# Altium PCB PCB1.PcbDoc
Units mil, origin at the board's own origin, x right, y up, seen from the top; angles counter-clockwise.
Board outline 1770 x 1615 mil, 2 copper layers (Top Layer, Bottom Layer); 40 components, 31 nets, 201 pads, 25 vias.
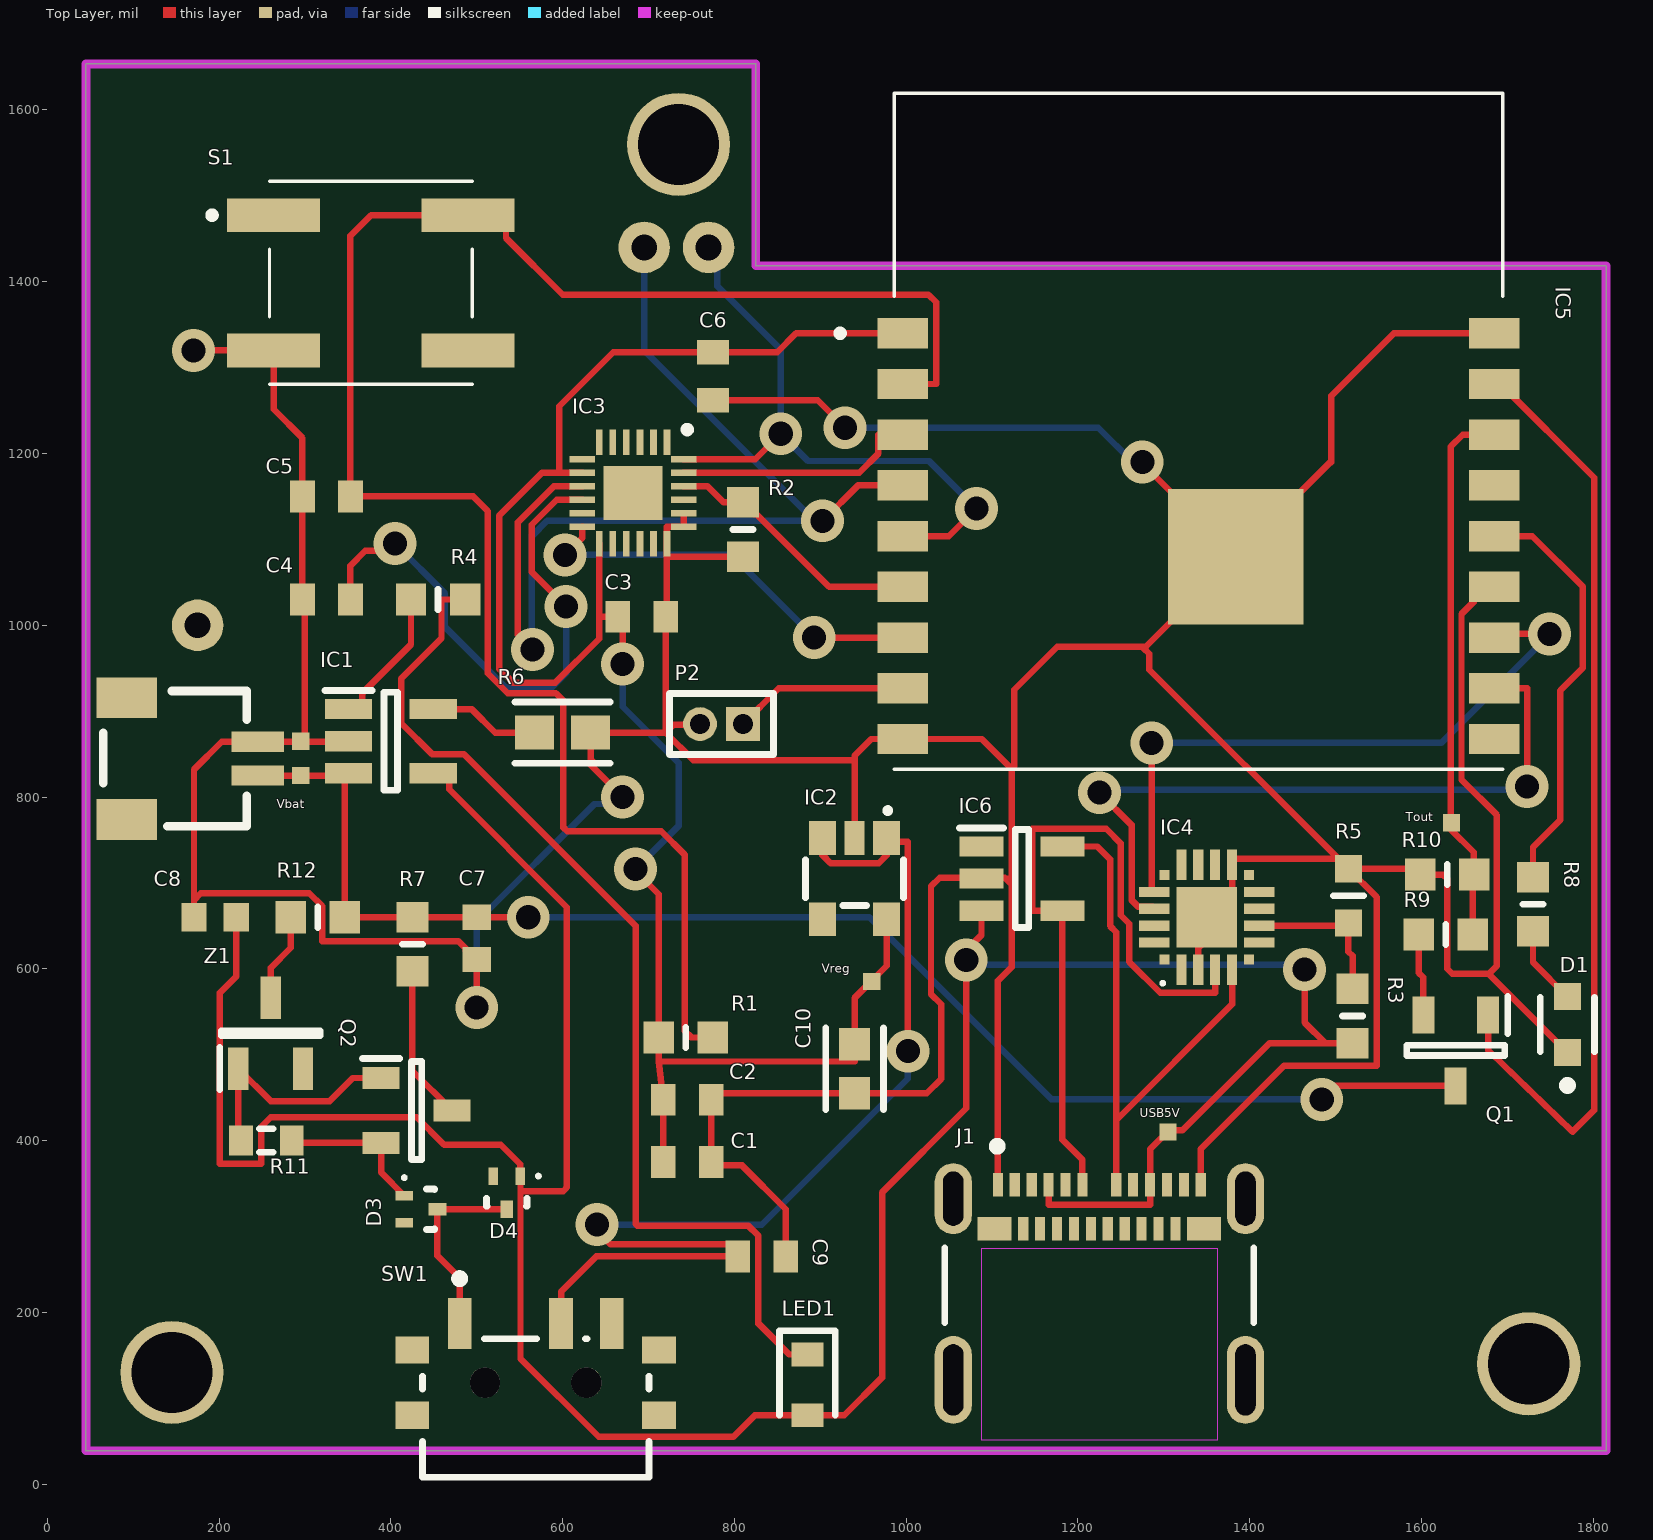
[diagram p0: Top Layer view]
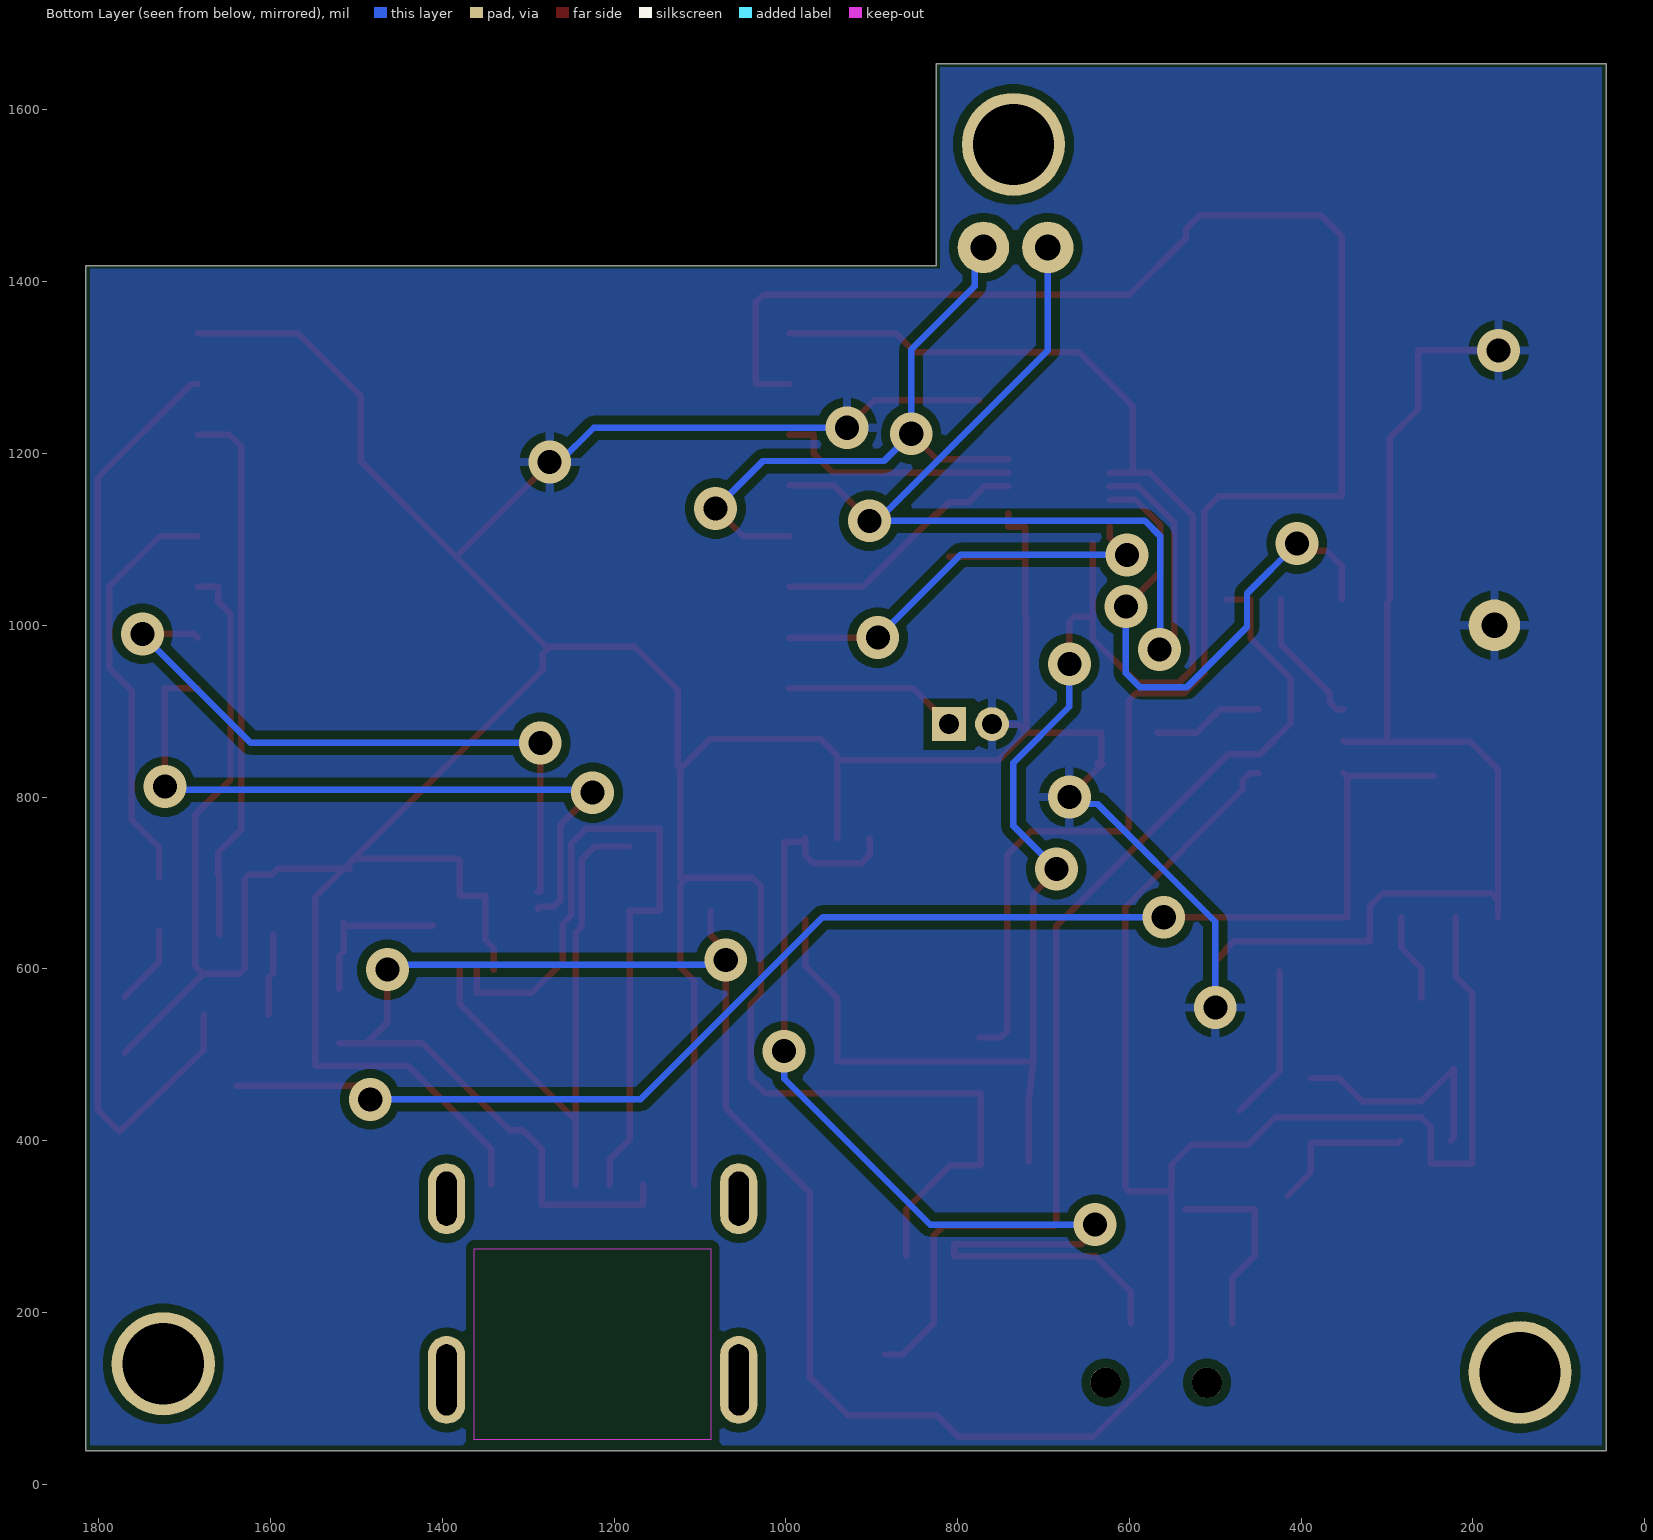
[diagram p1: Bottom Layer view, seen from below]
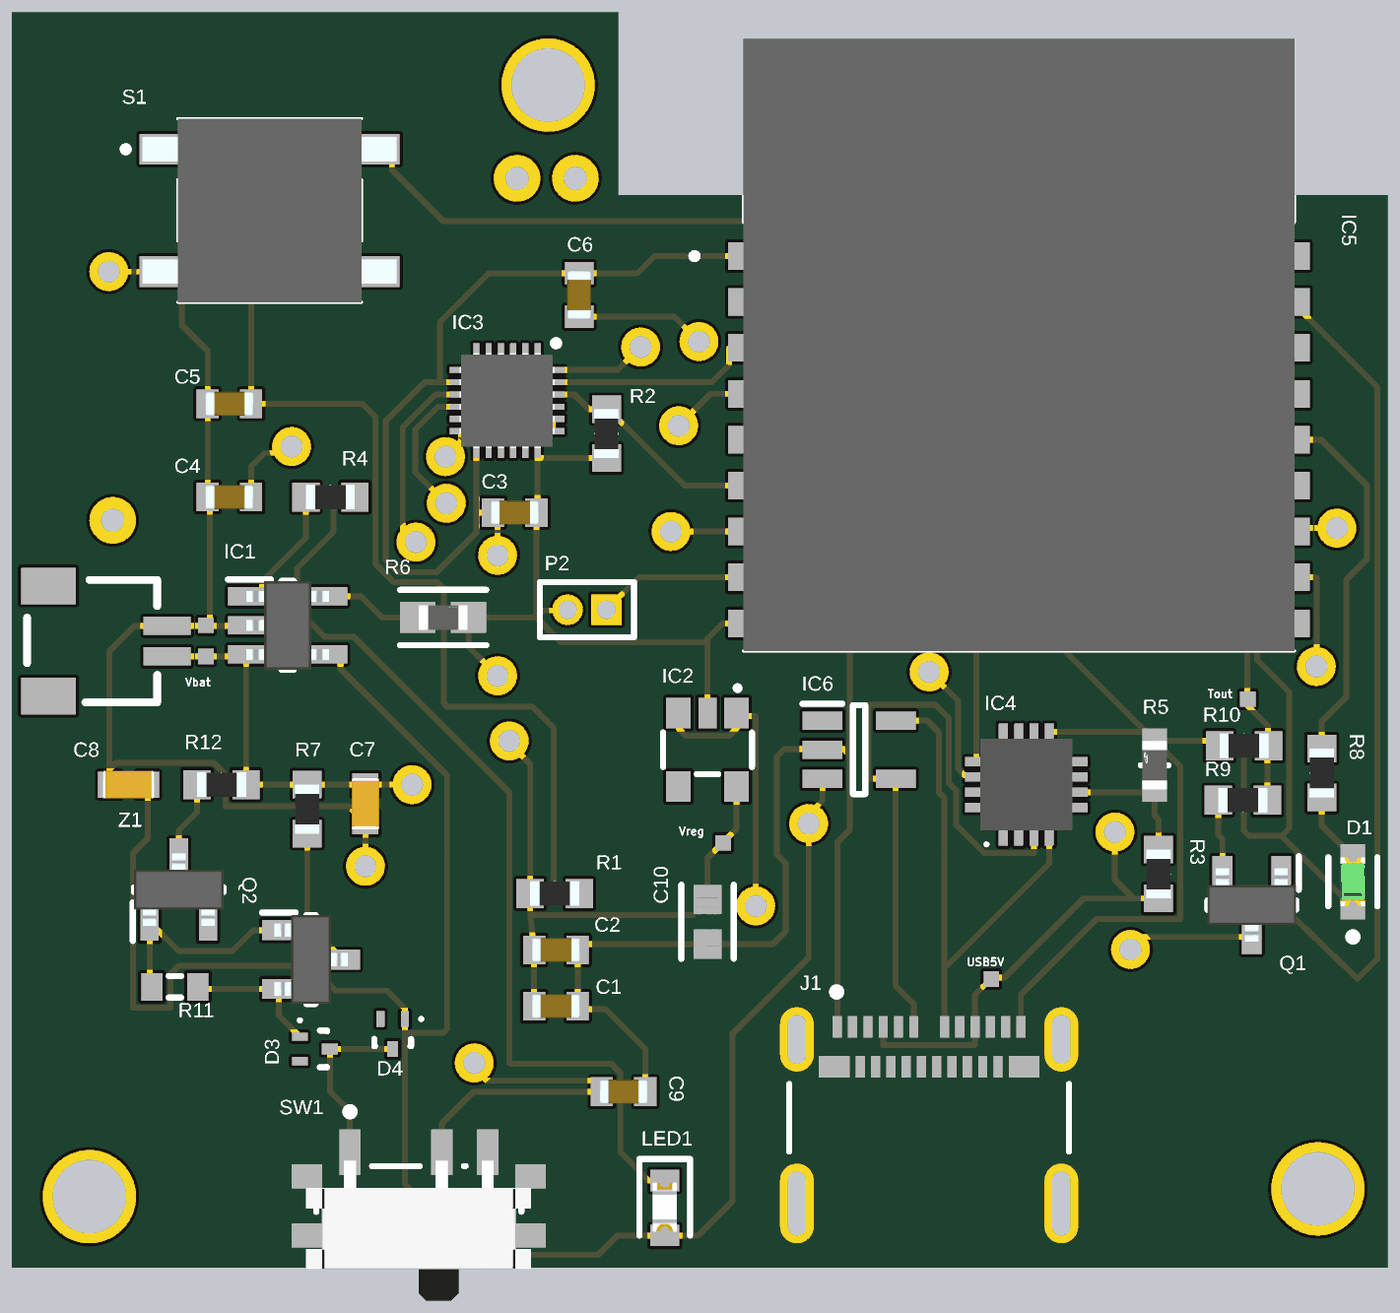
[diagram p2: 3D render of the assembled board from above, using the file's embedded part models]

## Layer stack, top to bottom
Top Solder: solder mask 0.4, Solder Resist, Dk 3.5
Top Layer: signal copper 1.4
Dielectric 1: dielectric 12.6, FR-4, Dk 4.8
Bottom Layer: signal copper 1.4
Bottom Solder: solder mask 0.4, Solder Resist, Dk 3.5

## Board outline
45,38.58 45,1653.58 825,1653.58 825,1418.58 1815,1418.58 1815,38.58

## Design rules (kind name [scope] priority, off if disabled: settings)
Clearance [All] p1: gap=10 ignorepadtopadclearanceinfootprint=FALSE except(0: Arc-Hole Track-Hole SMDPad-Hole THPad-Hole Via-Hole Fill-Hole Poly-Hole Region-Hole Text-Hole; 5: Arc-Arc Arc-Track Arc-SMDPad Track-Track Track-SMDPad SMDPad-SMDPad)
PolygonConnect [All] p1: connectstyle=Relief reliefconductorwidth=10 reliefentries=4 polygonreliefangle="90 Angle" airgapwidth=10
RoutingVias [All] p1: holewidth=28 width=50 viastyle="Through Hole" minholewidth=28 minwidth=50 maxholewidth=28 maxwidth=50
SolderMaskExpansion [All] p1: expansion=4 istentingtop=FALSE
Width [All] p1: maxlimit=10 minlimit=5 preferedwidth=7.5 minimp=50.000000 maximp=50.000000 favimp=50.000000 checkconnectedcopper=TRUE
30 further rules are at their usual default settings.

## Components (designator, comment, footprint, x,y, rotation, side; value= is the part's Value field where it differs from the comment)
C1 "CL10B103KB8NNNC" CAPC1608X90N 745,375 r0 top
C2 "CL10B103KB8NNNC" CAPC1608X90N 745,447.4 r0 top
C3 "CL10B104KB8NNWC" CAPC1608X90N 692.05,1010 r0 top
C4 "CL10B104KB8NNWC" CAPC1608X90N 325,1030 r180 top
C5 "CL10B104KB8NNWC" CAPC1608X90N 325,1150 r180 top
C6 "CL10B104KB8NNWC" CAPC1608X90N 775,1290 r270 top
C7 "CL10A475KQ8NNNC" CAPC1608X90X30LL10T20 500,635.39 r270 top
C8 "CL10A475KQ8NNNC" CAPC1608X90X30LL10T20 195.39,660 r0 top
C9 "CL10B104KB8NNWC" CAPC1608X90N 832.05,265 r0 top
C10 "CL10B105KP8NFNC" FP-CL10-IPC_B 940,483.62 r270 top
D1 "SML-E12P8WT86" FP-SML-E12-MFG 1770,535 r90 top
D3 "MMBD301M3T5G" ONSC-SOT-723-3-631AA-01_V 435,320 r0 top
D4 "MMBD301M3T5G" ONSC-SOT-723-3-631AA-01_V 535,339.29 r270 top
IC1 "MCP73831T-2ATI_OT" SOT95P270X145-5N 400,865 r0 top
IC2 "TCR2EF33,LM_CT" SOT-25 940,705 r180 top
IC3 "MPU-6881" QFN40P300X300X95-25N-D 682.13,1154.06 r270 top
IC4 "CP2102N-A02-GQFN20" CP2102NA02GQFN20 1350,660 r90 top
IC5 "ESP-WROOM-02D_M1102H3200PH3Q0_" ESPWROOM02DM1102H3200PH3Q0 1340.51,1225.83 r0 top
IC6 "SP0504BAHTG" SOT95P280X145-5N 1135,705 r0 top
J1 "1054500101" FP-1054500101-MFG 1225,200 r0 top
J2 "SM02B-SRSS-TB__LF__SN_" SM02B-SRSS-TB 64.88,923.42 r270 top
LED1 "SML-D12Y1WT86" LEDC1608X55N 885,115.43 r270 top
P2 "MHDR1X2" MHDR1X2 810,885 r180 top
Q1 "SSM3J356R,LF" SOT96P240X110-3N 1640,505 r270 top
Q2 "SSM3J356R,LF" SOT96P240X110-3N 430,435 r0 top
R1 "CR0603-FX-1002ELF" RESC1608X55N 743.5,520 r180 top
R2 "CR0603-FX-1002ELF" RESC1608X55N 810,1111.5 r270 top
R3 "CR0603-FX-2212ELF" RESC1608X55N 1520,545 r90 top
R4 "CR0603-FX-1001ELF" RESC1608X55N 455,1030 r180 top
R5 "RC1608F4752CS" FP-RC1608-MFG 1515,685 r90 top
R6 "CR0603-FX-2001ELF" FP-CR0603-IPC_A 600,875 r0 top
R7 "CR0603-FX-1001ELF" RESC1608X55N 425,628.5 r270 top
R8 "CR0603-FX-1001ELF" RESC1608X55N 1730,675 r270 top
R9 "CR0603-FX-1001ELF" RESC1608X55N 1628.5,640 r0 top
R10 "CR0603-FX-1001ELF" RESC1608X55N 1630,710 r180 top
R11 "Res3" J1-0603 255,400 r0 top value=0
R12 "CR0603-FX-1002ELF" RESC1608X55N 315,660 r0 top
S1 "EVP-BFAC1A000" EVPBFAC1A000 376.81,1398.74 r180 top
SW1 "PCM12SMTR" FP-PCM12SMTR-MFG 568.7,88.58 r0 top
Z1 "MMBZ5225BLT1G" SOT96P237X111-3N 260,525 r90 top

## Footprints (in the part's own frame and the unit in brackets; to place one, negate y for a bottom-side part, rotate by r counter-clockwise, add the part's x,y. Pads: shape width x height; smd on the part's side, far side on the other; paste and mask are expansions set on the pad)
CAPC1608X90N [mm]
  rect 0.73x0.94 smd: 1(-0.71,0) 2(0.71,0)
  body extent -0.8,-0.4 0.8,0.4, height 0.9
CAPC1608X90X30LL10T20 [mm] "Chip Capacitor, 2-Leads, Body 1.70x0.90mm, IPC High Density"
  rect 0.75x0.85 smd: 1(-0.625,0) 2(0.625,0)
  body extent -0.85,-0.45 0.85,0.45, height 0.9
CP2102NA02GQFN20 [mm]
  rect 0.3x0.3 smd: 1(-1.25,1.25) 6(-1.25,-1.25) 11(1.25,-1.25) 16(1.25,1.25)
  rect 0.9x0.3 smd: 2(-1.55,0.75) 3(-1.55,0.25) 4(-1.55,-0.25) 5(-1.55,-0.75) 12(1.55,-0.75) 13(1.55,-0.25) 14(1.55,0.25) 15(1.55,0.75)
  rect 0.3x0.9 smd: 7(-0.75,-1.55) 8(-0.25,-1.55) 9(0.25,-1.55) 10(0.75,-1.55) 17(0.75,1.55) 18(0.25,1.55) 19(-0.25,1.55) 20(-0.75,1.55)
  rect 1.8x1.8 smd: 21(0,0)
  silkscreen extent -2,1.25 -1.9,1.35, body extent -1.5,-1.5 1.5,1.5, height 0.75
ESPWROOM02DM1102H3200PH3Q0 [mm]
  rect 1.5x0.9 smd: 1(-8.75,2.9) 2(-8.75,1.4) 3(-8.75,-0.1) 4(-8.75,-1.6) 5(-8.75,-3.1) 6(-8.75,-4.6) 7(-8.75,-6.1) 8(-8.75,-7.6) 9(-8.75,-9.1) 10(8.75,-9.1) 11(8.75,-7.6) 12(8.75,-6.1) 13(8.75,-4.6) 14(8.75,-3.1) 15(8.75,-1.6) 16(8.75,-0.1) 17(8.75,1.4) 18(8.75,2.9)
  rect 4x4 smd: 19(1.1,-3.71)
  silkscreen extent -10.7,-10 9,10, body extent -9,-10 9,10, height 3.4
EVPBFAC1A000 [mm]
  rect 2.75x1 smd: A1(2.875,-2) A2(-2.875,-2) B1(2.875,2) B2(-2.875,2)
  silkscreen extent -3,-3 4.8,3, body extent -4.15,-3 4.15,3, height 3.8
FP-1054500101-MFG [mm]
  rrect100% 1.1x2.1 hole 1.6 slot 0.6 at 0 deg paste-1000 mask+0: 1(-4.32,3.36) 2(4.32,3.36)
  rrect100% 1.1x2.6 hole 2.1 slot 0.6 at 0 deg paste-1000 mask+0: 3(-4.32,-2) 4(4.32,-2)
  rect 0.3x0.7 smd paste+0 mask+0: A1(-3,3.77) A2(-2.5,3.77) A3(-2,3.77) A4(-1.5,3.77) A5(-1,3.77) A6(-0.5,3.77) A7(0.5,3.77) A8(1,3.77) A9(1.5,3.77) A10(2,3.77) A11(2.5,3.77) A12(3,3.77) B2(2.25,2.47) B3(1.75,2.47) B4(1.25,2.47) B5(0.75,2.47) B6(0.25,2.47) B7(-0.25,2.47) B8(-0.75,2.47) B9(-1.25,2.47) B10(-1.75,2.47) B11(-2.25,2.47)
  rect 1x0.7 smd paste+0 mask+0: B1(3.1,2.47) B12(-3.1,2.47)
  Keep-Out Layer region: -3.5,-3.77 3.5,-3.77 3.5,1.88 -3.5,1.88
  silkscreen extent -4.57,-0.3 4.57,5.03
FP-CL10-IPC_B [mil]
  rect 37.72x35.91 smd paste+0 mask+0: 1(-28.62,0) 2(28.62,0)
  silkscreen extent -47,-34 47,34, body extent -57,-28 57,28, height 10
FP-CR0603-IPC_A [mil]
  rect 45.6x39.85 smd paste+0 mask+0: 1(-32.56,0) 2(32.56,0)
  silkscreen extent -55,-36 55,36, body extent -75,-40 75,40, height 10
FP-PCM12SMTR-MFG [mm]
  rect 0.7x1.5 smd paste+0 mask+0: 1(-2.25,2.5) 2(0.75,2.5) 3(2.25,2.5)
  rect 1x0.8 smd paste+0 mask+0: 4(-3.65,1.715) 5(3.65,1.715) 6(-3.65,-0.215) 7(3.65,-0.215)
  round 0.9 hole 0.9 unplated paste-1000 mask+0: ""(-1.5,0.75) ""(1.5,0.75)
  silkscreen extent -3.35,-2.05 3.35,3.95, body extent -4.25,-2.15 4.25,3.35, height 0.25
FP-RC1608-MFG [mm]
  rect 0.8x0.8 smd paste+0 mask+0: 1(-0.8,0) 2(0.8,0)
  silkscreen extent 0,-0.45 0,0.45, body extent -1.3,-0.55 1.3,0.55, height 0.25
FP-SML-E12-MFG [mm]
  rect 0.8x0.8 smd paste+0 mask+0: 1(-0.825,0) 2(0.825,0)
  silkscreen extent -1.92,-0.8 0.8,0.8, body extent -1.33,-0.55 1.33,0.55, height 0.25
J1-0603 [mm] "Chip Resistor, Body 1.6x0.8mm, IPC High Density"
  rect 0.7x0.9 smd: 1(-0.75,0) 2(0.75,0)
  silkscreen extent -0.2,-0.35 0.2,0.35, body extent -0.85,-0.48 0.85,0.48, height 0.9
LEDC1608X55N [mm]
  rect 0.7x0.95 smd: 1(-0.9,0) 2(0.9,0)
  silkscreen extent -1.6,-0.82 0.9,0.82, body extent -0.83,-0.4 0.77,0.4, height 0.55
MHDR1X2 [mm] "Connector; Header; 2 Position"
  rect 1x1 hole 0.6: 1(0,0)
  round 1 hole 0.6: 2(1.27,0)
  silkscreen extent -0.9,-0.9 2.17,0.9
ONSC-SOT-723-3-631AA-01_V [mm] "SOT223, 3-Leads, Body 1.2x0.8mm, Pitch 0.4mm"
  rect 0.52x0.27 smd: 1(-0.49,0.4) 2(-0.49,-0.4)
  rect 0.52x0.36 smd: 3(0.49,0)
  silkscreen extent -0.54,-0.6 0.4,0.98, body extent -0.4,-0.6 0.4,0.6, height 0.55
QFN40P300X300X95-25N-D [mm]
  rect 0.75x0.2 smd: 1(-1.5,1) 2(-1.5,0.6) 3(-1.5,0.2) 4(-1.5,-0.2) 5(-1.5,-0.6) 6(-1.5,-1) 13(1.5,-1) 14(1.5,-0.6) 15(1.5,-0.2) 16(1.5,0.2) 17(1.5,0.6) 18(1.5,1)
  rect 0.2x0.75 smd: 7(-1,-1.5) 8(-0.6,-1.5) 9(-0.2,-1.5) 10(0.2,-1.5) 11(0.6,-1.5) 12(1,-1.5) 19(1,1.5) 20(0.6,1.5) 21(0.2,1.5) 22(-0.2,1.5) 23(-0.6,1.5) 24(-1,1.5)
  rect 1.59x1.75 smd: 25(0,0)
  silkscreen extent -1.97,1.5 -1.78,1.7, body extent -1.55,-1.55 1.55,1.55, height 0.95
RESC1608X55N [mm]
  rect 0.9x0.95 smd: 1(-0.8,0) 2(0.8,0)
  silkscreen extent 0,-0.3 0,0.3, body extent -0.8,-0.4 0.8,0.4, height 0.55
SM02B-SRSS-TB [mm]
  rect 0.6x1.55 smd: 1(1.5,4.575) 2(2.5,4.575)
  rect 1.2x1.8 smd: 3(0.2,0.7) 4(3.8,0.7)
  silkscreen extent 0,0 4,4.25
SOT95P270X145-5N [mm]
  rect 1.4x0.6 smd: 1(-1.25,0.95) 2(-1.25,0) 3(-1.25,-0.95) 4(1.25,-0.95) 5(1.25,0.95)
  silkscreen extent -1.95,-1.45 0.2,1.5, body extent -1.35,-1.45 1.35,1.45, height 1.45
SOT95P280X145-5N [mm]
  rect 1.3x0.6 smd: 1(-1.2,0.95) 2(-1.2,0) 3(-1.2,-0.95) 4(1.2,-0.95) 5(1.2,0.95)
  silkscreen extent -1.85,-1.45 0.2,1.5
SOT96P237X111-3N [mm]
  rect 1.25x0.6 smd: 1(-1.05,0.955) 2(-1.05,-0.955) 3(1.05,0)
  silkscreen extent -1.68,-1.46 0.07,1.51, body extent -1.18,-1.46 1.18,1.46, height 1.11
SOT96P240X110-3N [mm]
  rect 1.1x0.65 smd: 1(-1.05,0.96) 2(-1.05,-0.96) 3(1.05,0)
  silkscreen extent -1.6,-1.45 0.15,1.54, body extent -1.2,-1.45 1.2,1.45, height 1.1
SOT-25 [mm]
  rect 0.8x1 smd: 1(-0.95,-1.2) 3(0.95,-1.2) 4(0.95,1.2) 5(-0.95,1.2)
  rect 0.6x1 smd: 2(0,-1.2)
  silkscreen extent -1.45,-2.07 1.45,0.8

## Part data
C1 C2: "Capacitor", Manufacturer_Name="Samsung Electro-Mechanics", Mouser Part Number=187-CL10B103KB8NNNC, Arrow Part Number=CL10B103KB8NNNC, Arrow Price/Stock=https://www.arrow.com/en/products/cl10b103kb8nnnc/samsung-electro-mechanics?region=nac, Datasheet Link=https://datasheet.datasheetarchive.com/originals/distributors/Datasheets_SAMA/f3f01ceab90a863c6d6e9eba92d45bd3.pdf, Height=0.9mm, Manufacturer_Part_Number=CL10B103KB8NNNC, Mouser Price/Stock=https://www.mouser.co.uk/ProductDetail/Samsung-Electro-Mechanics/CL10B103KB8NNNC?qs=349EhDEZ59pAsZxZjVI0UQ%3D%3D
C3 C4 C5 C6 C9: "Capacitor", Manufacturer_Name="Samsung Electro-Mechanics", Datasheet Link=http://www.samsungsem.com/kr/support/product-search/mlcc/CL10B104KB8NNWC.jsp, Height=0.9mm, Manufacturer_Part_Number=CL10B104KB8NNWC
C7 C8: library part CMP-2000-06090-1, "Chip Capacitor, 4.7 uF, +/- 10%, 6.3 V, -55 to 85 degC, 0603 (1608 Metric), RoHS, Tape and Reel", Capacitance=4700000pF, Case Size/Dimension=0603, Dielectric=X5R, Manufacturer="Samsung Electro-Mechanics", Package Description="2-Pin Surface Mount Device, Body 1.60 x 0.80 mm", Rated Voltage=6.3V, Tolerance (%)=±10%, Datasheet URL=http://www.samsungsem.com/kr/support/product-search/mlcc/__icsFiles/afieldfile/2016/08/18/S_CL10A475KQ8NNNC.pdf, Datasheet Version=07/2016, Manufacturer URL=http://www.samsungsem.com/global/index.jsp, Mounting Technology=SurfaceMount, Package Reference=0603
C10: library part CMP-13271-002470-1, "Cap Ceramic 1uF 10V X7R ±10% Pad SMD 0603 +125°C T/R", Capacitance=1uF, Case Code (Imperial)=0603, Case Code (Metric)=1608, Dielectric=X7R, Max Operating Temperature=125°C, Min Operating Temperature=-55°C, Package Quantity=1, Tolerance=10%, Voltage Rating=10V, Case/Package=0603, Depth=0.8mm, Height=0.8mm, Length=0.063inch, Mount="Surface Mount", Packaging="Tape and Reel", Radiation Hardening=No, Thickness=0.035inch, Width=0.031inch
D1: library part CMP-08952-000024-1, "LED GREEN DIFFUSED 0603 SMD", Colour=Green, Forward Current=20mA, Forward Voltage=2.2V, Manufacturer=Rohm, Package=SML-E12, Power Dissipation=54mW, Reverse Voltage=5V, Temperature="-40°C to +85°C", Temperature Range High=+85°C, Temperature Range Low=-40°C, Automotive=No, Category=Diode, ComponentLink2Description=Datasheet, ComponentLink2URL=https://fscdn.rohm.com/en/products/databook/datasheet/opto/led/chip_mono/sml-e1-e.pdf, Device Class L1=Optoelectronics, Device Class L2=LEDs, Device Class L3=unset, Digikey Description="LED GREEN DIFFUSED 0603 SMD", Height=0.4mm, Lead Free=Yes, Led Orientation="Top View", Luminous Intensity=6.3mcd, Manufacturer Part Number=SML-E12P8WT86, Mouser Description="LED Uni-Color Green 2-Pin Chip 0603(1608Metric) T/R", Octopart=https://octopart.com/sml-e12p8wt86-rohm-9290854, RoHS=TRUE, Wavelength=560nm
D3 D4: library part CMP-1055-00589-1, "Silicon Hot-Carrier Diode, Schottky Barrier Diode, 3-Pin SOT-723, Pb-Free, Tape and Reel", Manufacturer="On Semiconductor", ComponentLink1Description="Manufacturer URL", ComponentLink1URL=http://www.onsemi.com/, ComponentLink2Description=Datasheet, ComponentLink2URL=http://www.onsemi.cn/pub_link/Collateral/MMBD301M3-D.PDF, ComponentLink3Description="Package Specification", ComponentLink3URL=http://www.onsemi.com/pub_link/Collateral/631AA.PDF, Configuration=Single, DatasheetVersion="Rev. 1", Mounting Technology="Surface Mount", PackageDescription="3-Pin Small Outline Transistor, Body 1.2 x 0.8 mm, Pitch 0.4 mm", PackageReference=SOT-723-3-631AA-01, PackageVersion="Rev. D, 08/2009", Packing="Tape and Reel", PartNumber=MMBD301M3T5G, RoHS=TRUE
IC1: "Integrated Circuit", Arrow Part Number=MCP73831T-2ATI/OT, Manufacturer_Name=Microchip, Mouser Part Number=579-MCP73831T-2ATIOT, Arrow Price/Stock=https://www.arrow.com/en/products/mcp73831t-2atiot/microchip-technology?region=nac, Datasheet Link=https://datasheet.datasheetarchive.com/originals/distributors/Datasheets-DGA15/727147.pdf, Height=1.45mm, Manufacturer_Part_Number=MCP73831T-2ATI/OT, Mouser Price/Stock=https://www.mouser.co.uk/ProductDetail/Microchip-Technology/MCP73831T-2ATI-OT?qs=yUQqVecv4qsZbioEUu%252B83g%3D%3D
IC2: "Integrated Circuit", Arrow Part Number=TCR2EF33,LM(CT, Manufacturer_Name=Toshiba, Mouser Part Number=757-TCR2EF33LMCT, Arrow Price/Stock=https://www.arrow.com/en/products/tcr2ef33lm-ct/toshiba, Datasheet Link=https://toshiba.semicon-storage.com/eu/product/linear/power-supply/detail.TCR2EF33.html, Manufacturer_Part_Number=TCR2EF33,LM(CT, Mouser Price/Stock=https://www.mouser.co.uk/ProductDetail/Toshiba/TCR2EF33LMCT?qs=EPmvyOv1YlPmhsvS3PaWfg%3D%3D
IC3: "Integrated Circuit", Manufacturer_Name=TDK, Mouser Part Number=410-MPU-6881, Arrow Part Number=MPU-6881, Arrow Price/Stock=https://www.arrow.com/en/products/mpu-6881/invensense?region=nac, Datasheet Link=https://www.semiconductorstore.com/Images/Items/Uploaded/0236/mpu-6881-a7be4.pdf, Height=0.95mm, Manufacturer_Part_Number=MPU-6881, Mouser Price/Stock=https://www.mouser.co.uk/ProductDetail/TDK-InvenSense/MPU-6881?qs=u4fy%2FsgLU9MthFpyRcZ0%252Bg%3D%3D
IC4: "Integrated Circuit", Manufacturer_Name="Silicon Labs", Mouser Part Number=634-CP2102NA02GQFN20, Arrow Part Number=CP2102N-A02-GQFN20, Arrow Price/Stock=https://www.arrow.com/en/products/cp2102n-a02-gqfn20/silicon-labs?region=nac, Datasheet Link=https://www.silabs.com/documents/public/data-sheets/cp2102n-datasheet.pdf, Height=0.8mm, Manufacturer_Part_Number=CP2102N-A02-GQFN20, Mouser Price/Stock=https://www.mouser.co.uk/ProductDetail/Silicon-Labs/CP2102N-A02-GQFN20?qs=u16ybLDytRaG8WdlP0fT2g%3D%3D
IC5: "Integrated Circuit", Manufacturer_Name="Espressif Systems", Manufacturer_Part_Number=ESP-WROOM-02D(M1102H3200PH3Q0), Mouser Part Number=356-ESPWROOM02D(4MB), Datasheet Link=https://www.mouser.com.tr/datasheet/2/891/esp-wroom-02d_esp-wroom-02u_datasheet_en-1365835.pdf, Height=3.3mm, Mouser Price/Stock=https://www.mouser.co.uk/ProductDetail/Espressif-Systems/ESP-WROOM-02DM1102H3200PH3Q0?qs=W%2FMpXkg%252BdQ6VfEEQ948I3Q%3D%3D
IC6: "Integrated Circuit", Manufacturer_Name=LITTELFUSE, Mouser Part Number=576-SP0504BAHTG, Arrow Part Number=SP0504BAHTG, Arrow Price/Stock=https://www.arrow.com/en/products/sp0504bahtg/littelfuse, Datasheet Link=http://componentsearchengine.com/Datasheets/1/SP0504BAHTG.pdf, Height=1.45mm, Manufacturer_Part_Number=SP0504BAHTG, Mouser Price/Stock=https://www.mouser.co.uk/ProductDetail/Littelfuse/SP0504BAHTG?qs=zR8PVLWe1trv9sWzoBaD%252Bg%3D%3D
J1: library part CMP-04767-000004-1, "CONN RCP USB3.1 TYPEC 24P SMD RA", Current Rating=0.25/1.25/5A, Manufacturer=Molex, Package=0, Temperature="-30°C to +85°C", Temperature Range High=+85°C, Temperature Range Low=-30°C, Voltage Rating=30V, Automotive=No, Category=Conn, ComponentLink2Description=Datasheet, ComponentLink2URL=https://www.molex.com/webdocs/datasheets/pdf/en-us/1054500101_IO_CONNECTORS.pdf, Conn Orientation="Right Angle", Contact Material=Gold,Nickel, Device Class L1=Connectors, Device Class L2="USB Connectors", Device Class L3=unset, Digikey Description="CONN RCP USB3.1 TYPEC 24P SMD RA", Footprint Url=https://www.molex.com/pdm_docs/sd/1054500101_sd.pdf, Height=3.44mm, Is Female=yes, Lead Free=Yes, Manufacturer Part Number=1054500101, Mouser Description="USB Shielded I/O Receptacle; Type C; Right Angle; Surface Mount; Gold over Nickel", Number Of Contacts=24, Octopart=https://octopart.com/105450-0101-molex-68082325, Pitch=0.5mm, RoHS=TRUE, Shielding=true, Usb Standard="USB 3.1"
J2: "Connector", Manufacturer_Name="JST (JAPAN SOLDERLESS TERMINALS)", Manufacturer_Part_Number="SM02B-SRSS-TB (LF)(SN)", Datasheet Link=http://www.jst-mfg.com/product/pdf/eng/eSH.pdf
LED1: "LED", Manufacturer_Name="ROHM Semiconductor", Mouser Part Number=755-SML-D12Y1WT86, Datasheet Link=https://componentsearchengine.com/Datasheets/1/SML-D12Y1WT86.pdf, Height=0.55mm, Manufacturer_Part_Number=SML-D12Y1WT86, Mouser Price/Stock=https://www.mouser.co.uk/ProductDetail/ROHM-Semiconductor/SML-D12Y1WT86?qs=M3jcYzEJUdG%2FAKvzZK%252Bz7w%3D%3D
P2: "Header, 2-Pin", LatestRevisionDate=17-Jul-2002, LatestRevisionNote="Re-released for DXP Platform.", Publisher="Altium Limited"
Q1 Q2: "MOSFET (P-Channel)", Manufacturer_Name=Toshiba, Mouser Part Number=757-SSM3J356RLF, Arrow Part Number=SSM3J356R,LF, Arrow Price/Stock=https://www.arrow.com/en/products/ssm3j356rlf/toshiba?region=nac, Datasheet Link=http://toshiba.semicon-storage.com/info/docget.jsp?did=30685&prodName=SSM3J356R, Height=0.88mm, Manufacturer_Part_Number=SSM3J356R,LF, Mouser Price/Stock=https://www.mouser.co.uk/ProductDetail/Toshiba/SSM3J356RLF?qs=lhkzy8lC%252BSsL%2F1yLGjMnQA%3D%3D
R1 R2 R12: "Resistor", Manufacturer_Name=Bourns, Mouser Part Number=652-CR0603FX-1002ELF, Arrow Part Number=CR0603-FX-1002ELF, Arrow Price/Stock=https://www.arrow.com/en/products/cr0603-fx-1002elf/bourns?region=nac, Datasheet Link=https://www.bourns.com/pdfs/chpreztr.pdf, Height=0.55mm, Manufacturer_Part_Number=CR0603-FX-1002ELF, Mouser Price/Stock=https://www.mouser.co.uk/ProductDetail/Bourns/CR0603-FX-1002ELF?qs=K5ddiUFZPT6XHG0dQH96QA%3D%3D
R3: "Resistor", Manufacturer_Name=Bourns, Mouser Part Number=652-CR0603FX-2212ELF, Arrow Part Number=CR0603-FX-2212ELF, Arrow Price/Stock=https://www.arrow.com/en/products/cr0603-fx-2212elf/bourns, Datasheet Link=https://www.bourns.com/pdfs/chpreztr.pdf, Height=0.55mm, Manufacturer_Part_Number=CR0603-FX-2212ELF, Mouser Price/Stock=https://www.mouser.co.uk/ProductDetail/Bourns/CR0603-FX-2212ELF?qs=zx2075yZkZJFzojWSdyX6Q%3D%3D
R4 R7 R8 R9 R10: "Resistor", Manufacturer_Name=Bourns, Mouser Part Number=652-CR0603FX-1001ELF, Arrow Part Number=CR0603-FX-1001ELF, Arrow Price/Stock=https://www.arrow.com/en/products/cr0603-fx-1001elf/bourns?region=nac, Datasheet Link=https://www.bourns.com/pdfs/chpreztr.pdf, Height=0.55mm, Manufacturer_Part_Number=CR0603-FX-1001ELF, Mouser Price/Stock=https://www.mouser.co.uk/ProductDetail/Bourns/CR0603-FX-1001ELF?qs=K5ddiUFZPT4YQXF75Ui8dQ%3D%3D
R5: library part CMP-13261-003173-1, "Res Thick Film 0603 47.5kΩ 1% 0.1W ±100ppm/°C Molded SMD T/R", Case Code (Imperial)=0603, Case Code (Metric)=1608, Max Operating Temperature=155°C, Max Power Dissipation=100mW, Min Operating Temperature=-55°C, Resistance=47.5kR, Temperature Coefficient=100ppm/°C, Tolerance=1%, Voltage Rating (DC)=50V, Case/Package=0603, Composition="Thick Film", Contact Plating=Tin, Depth=0.8mm, Features="Moisture Resistant", Height=0.022inch, Lead Free="Lead Free", Length=0.063inch, Military Standard=Not, Number of Terminations=2, Packaging="Tape and Reel", Power Rating=100mW, Radiation Hardening=No, Width=0.031inch
R6: library part CMP-07231-005707-1, "Thick Film Chip Resistors 0603 2kΩ 0.1W 1% 100ppm/°C", Case Code (Imperial)=0603, Case Code (Metric)=1608, Max Operating Temperature=155°C, Max Power Dissipation=100mW, Min Operating Temperature=-55°C, Package Quantity=1, Resistance=2kR, Temperature Coefficient=100ppm/°C, Tolerance=1%, Voltage Rating=50V, Case/Package=0603, Composition="Thick Film", Contact Plating=Tin, Depth=0.8mm, Features="Moisture Resistant", Height=0.45mm, Length=1.6mm, Military Standard=Not, Mount="Surface Mount", Number of Pins=2, Number of Terminations=2, Packaging="Tape and Reel", Power Rating=100mW, Radiation Hardening=No, REACH SVHC="No SVHC", Termination=SMD/SMT, Thickness=457um, Voltage Rating (DC)=50V, Width=0.8mm
R11: "Resistor", LatestRevisionDate=29-May-2009, LatestRevisionNote="IPC-7351 Footprint Added.", PackageDescription="Chip Resistor", PackageReference=J1-0603, Published=8-Jun-2000, Publisher="Altium Limited"
S1: "Switch", Manufacturer_Name=Panasonic, Mouser Part Number=667-EVP-BFAC1A000, Arrow Part Number=EVP-BFAC1A000, Arrow Price/Stock=https://www.arrow.com/en/products/evp-bfac1a000/panasonic, Datasheet Link=https://industrial.panasonic.com/cdbs/www-data/pdf/ATK0000/ATK0000C432.pdf, Height=3.7mm, Manufacturer_Part_Number=EVP-BFAC1A000, Mouser Price/Stock=https://www.mouser.co.uk/ProductDetail/Panasonic/EVP-BFAC1A000?qs=OiaALIbqWFSeImjptaxnOQ%3D%3D
SW1: library part CMP-2000-06884-2, "SWITCH SLIDE SPDT 300MA 6V", Contact Current Rating=300mA, Contact Resistance=70mR, Insulation Resistance=100mR, Max Operating Temperature=85°C, Max Voltage Rating (DC)=6V, Min Operating Temperature=-20°C, Package Quantity=1, Actuator Length=1.5mm, Actuator Material=Nylon, Actuator Type=Standard, Contact Material="Copper Alloy", Contact Plating=Silver, Current Rating=300mA, Depth=5mm, Lead Free="Lead Free", Length=7.7mm, Max Current Rating=300mA, Mechanical Life=10000Cycles, Mount="Surface Mount", Orientation="Right Angle", Packaging="Tape and Reel", REACH SVHC="No SVHC", Switch Function=On-On, Switch Travel=1.5mm, Termination="Gull Wing", Throw Configuration=SPDT, Voltage Rating (AC)=6V, Voltage Rating (DC)=6V, Width=6.7mm
Z1: "Zener Diode", Manufacturer_Name="ON Semiconductor", Mouser Part Number=863-MMBZ5225BLT1G, Datasheet Link=https://www.onsemi.com/pdf/datasheet/mmbz5221blt1-d.pdf, Height=1.11mm, Manufacturer_Part_Number=MMBZ5225BLT1G, Mouser Price/Stock=https://www.mouser.co.uk/ProductDetail/onsemi/MMBZ5225BLT1G?qs=P4IOph%252Bbot8UVWwuT5140A%3D%3D

## Free pads (board coordinates)
  round 120 hole 94.5: 2(145,130) 2(735,1560) 2(1725,140)
  round 60 hole 30: 6(770,1440) 7(695,1440) 10(175,1000)
  rect 20x20 smd: 9(295,825) 9(295,865) 9(1305,410) 11(960,585) 11(1635,770)

## Via types
v1: diameter 50, hole 28, Top Layer to Bottom Layer, 25 vias

## Nets (pads, with @x,y where several pads share a name; then routed paths per layer and width w, separated by ;. In a path a pad name is that pad's centre, name@x,y a point inside that pad or via, vN(x,y) a via of type N, cw(c..) or ccw(c..) an arc to the next point about the centre after c; other vN are vias at no path point)
/CS: IC3.22 IC5.6 R2.1 | length 303.4
  Top Layer w7.5: IC3.22 768.73,1161.93 787.67,1142.99 R2.1 823.97,1129.03 825.99,1129.03 910.29,1044.72 IC5.6
GND: C1.2 C2.2 C3.2 C4.2 C5.2 C6.2 C7.2 C8.1 C9.2 C10.2 D1.1 IC1.2 IC2.2 IC3.18 IC3.19 IC3.20 IC4.3 IC4.12 IC4.21 IC5.9 IC5.13 IC5.18 IC5.19 IC6.2 J1.A1 J1.A12 J2.1 P2.2 pad.9@295,865 pad.10 R2.2 R5.2 R6.2 R10.2 S1.B1 | length 7834.2
  Top Layer w7.5: v1(170,1320) S1.B1 263.62,1251.43 297.05,1218 C5.2 C4.2 300,1027.05 300,865 pad.9@299.37,864.37 ; C8.1 170.79,680 ; IC1.2 350.16,864.37 pad.9@299.37,864.37 ; v1(500,555) C7.2 498.03,610.79 487.02,621.8 487.02,623.77 478.79,632 320,632 320,673 305,688 178.79,688 170.79,680 ; v1@675,795 v1(670,800) 631.25,838.75 637.63,838.75 632.56,843.83 R6.2 720,875 ; IC3.20 IC3.19 721.5,1114.69 IC3.18 721.5,1080 ; P2.2 759.06,884.06 729.06,884.06 720,875 ; C6.2 896.95,1262.05 v1(929,1230) ; R2.2 721.5,1080 ; C9.2 860,320 809,371 772.95,371 C1.2 772.95,411 C2.2 772.95,455 C10.2 1024,455 1040.75,471.75 1040.75,558.75 1029,570.5 1029,696 1039,706 1087.76,706 1115,706 1116,705 ; IC2.2 940,843 ; J1.A1 1106.89,585.89 1123,602 1123,698 1116,705 ; v1(1275,1190) 1275,1188.58 IC5.19 ; IC4.3 1340.16,624 1350,633.84 IC4.21 1350,685 1379.53,685 1379.53,725.84 1381.68,728 R5.2@1503.5,728 ; J1.A12 1343.11,390.11 1440,487 1548,487 1548,683.5 R5.2 ; IC5.13 1660.72,1044.72 1660.72,1027 1646.72,1013 1646.72,820.28 1688,779 1688,603.48 1678.52,594 ; IC5.18 1568,1340 1495,1267 1495,1190 1494.05,1190 IC5.19 ; D1.1 1678.52,594 ; 170.79,680 170.79,832 203.16,864.37 J2.1 pad.9@299.37,864.37 ; 720,875 C3.2 721.5,1011.5 721.5,1080 ; 720,875 752,843 940,843 ; 940,843 940,848 959.56,867.56 IC5.9 1088,867.56 1123,832.56 ; 1116,705 1123,705 1123,832.56 ; 1123,832.56 1125.97,835.53 1125.97,924.94 1176.04,975 1275,975 ; 1275,975 1277.03,972.97 1283.13,966.87 1283.13,948.36 R5.2@1503.5,728 ; 1275,975 1279.05,975 IC5.19 ; R5.2@1503.5,728 R5.2@1508.5,722.99 ; R5.2@1508.5,722.99 1508.5,716.5 R5.2 ; R5.2@1508.5,722.99 R5.2 ; R5.2 1592.01,716.5 R10.2 1599.26,709.24 1625.61,709.24 1630,704.85 1630,600 1635.78,594.22 1671.22,594.22 1671,594 1678.52,594
  Bottom Layer w7.5: v1(500,555) 500,654.8 637.07,791.87 661.87,791.87 v1(670,800) ; v1(929,1230) 1223.73,1230 1263.73,1190 v1(1275,1190)
INT1: IC3.12 IC5.7 | length 473.9
  Top Layer w7.5: v1(603,1082) 623.07,1102.07 IC3.12 ; v1(893,985.67) IC5.7
  Bottom Layer w7.5: v1(603,1082) 796.67,1082 v1(893,985.67)
IO16: IC5.17 Q1.1 | length 1111.3
  Top Layer w7.5: Q1.1 1677.8,505 1776,410.2 1801.25,435.45 1801.25,1171.75 1692.06,1280.94 IC5.17
MISO: IC3.9 IC5.4 pad.7 | length 1236.4
  Top Layer w7.5: v1(565,972) 548,989 548,1120 589.93,1161.93 IC3.9 ; v1(902.83,1121.67) 944,1162.83 IC5.4
  Bottom Layer w7.5: v1(565,972) 564.25,972.75 564.25,1104 581.92,1121.67 v1@893.33,1121.67 ; pad.7 695,1320 v1@893.33,1121.67 ; v1(902.83,1121.67) v1@893.33,1121.67
MOSI: IC3.24 IC5.5 pad.6 | length 740.2
  Top Layer w7.5: IC3.24 824.43,1193.43 v1(854,1223) ; IC5.5 1049.78,1103.78 v1(1082,1136)
  Bottom Layer w7.5: pad.6 780,1430 780,1395 854,1321 v1(854,1223) 885.75,1191.25 1026.75,1191.25 v1(1082,1136)
NetC4_1: C4.1 IC3.10 | length 660.5
  Top Layer w7.5: C4.1 352.95,1069.45 370.37,1086.87 396.87,1086.87 v1(405,1095) ; v1(604,1022) 564,1062 564,1117 593.18,1146.18 IC3.10
  Bottom Layer w7.5: v1(405,1095) 463.07,1036.93 463.07,997.93 533,928 588,928 604,944 v1(604,1022)
NetC5_1: C5.1 IC5.2 R1.1 S1.A2 | length 2178
  Top Layer w7.5: R1.1 750,520 742,528 742,733 715,760 605.39,760 601,764.39 601,912 592.25,920.75 536.25,920.75 513,944 513,1133 496,1150 C5.1 352.95,1453.43 377,1477.48 518.13,1477.48 534.06,1461.54 534.06,1450.94 600,1385 1026,1385 1035,1376 1035,1280.94 IC5.2
NetC9_1: C9.1 IC2.1 IC2.3 SW1.2 | length 1306.9
  Top Layer w7.5: SW1.2 598.23,224 639.23,265 C9.1 804.09,279 656,279 640,295 v1(640,302) ; IC2.3 902.6,732.4 912,723 968,723 977.4,732.4 IC2.1@977.4,748 ; IC2.1 IC2.1@977.4,748 ; v1(1002,504) 1002,748 IC2.1@977.4,748
  Bottom Layer w7.5: v1(640,302) 832,302 1002,472 v1(1002,504)
NetD1_2: D1.2 R8.2 | length 92.6
  Top Layer w7.5: R8.2 1730,607.48 D1.2
NetD3_1: D3.1 Q2.2 R11.2 | length 177.9
  Top Layer w7.5: R11.2 287.32,397.2 Q2.2 388.66,362.8 D3.1
NetD3_3: D3.3 D4.3 SW1.1 | length 224.4
  Top Layer w7.5: SW1.1 480.12,240 454.29,265.83 D3.3 D4.3
NetIC1_1: IC1.1 R4.2 | length 162.5
  Top Layer w7.5: IC1.1 358.88,902.4 366.94,910.46 366.94,921.1 423.5,977.66 R4.2
NetIC1_5: IC1.5 R6.1 | length 129.6
  Top Layer w7.5: IC1.5 494,902.4 521.4,875 R6.1
NetIC4_8: IC4.8 R3.2 R5.1 | length 184.4
  Top Layer w7.5: IC4.8 1511.65,650.16 R5.1 1515,650.16 1515,620 1520,615 R3.2
NetIC5_8: IC5.8 P2.1 | length 203.3
  Top Layer w7.5: P2.1 851.61,926.61 IC5.8
NetIC5_14: IC5.14 R8.1 | length 490
  Top Layer w7.5: IC5.14 1729.22,1103.78 1788.11,1044.89 1788.11,950.36 1761.75,924 1761.75,773.25 1730,741.5 R8.1
NetLED1_1: LED1.1 R4.1 | length 1231.6
  Top Layer w7.5: R4.1 459,1030 459,985 412,938 412,886 448,850 485,850 685,650 685,303 687,301 816,301 828,289 828,186.87 864,150.87 LED1.1
NetQ1_2: Q1.2 R9.1 | length 95.8
  Top Layer w7.5: R9.1 1597.01,595.2 1602.2,590 Q1.2
NetQ2_1: Q2.1 R11.1 Z1.1 | length 277.9
  Top Layer w7.5: R11.1 222.4,403.07 Z1.1 260.06,446 329,446 355.8,472.8 Q2.1
NetQ2_3: Q2.3 R7.2 | length 181.2
  Top Layer w7.5: R7.2 425,481.34 Q2.3
NetR12_1: R12.1 Z1.3 | length 103.4
  Top Layer w7.5: Z1.3 260,601 283.5,624.5 R12.1
RX: IC4.18 IC5.11 | length 825.1
  Top Layer w7.5: v1(1225,805) 1262.51,767.49 1262.51,680 1270.51,672 1286.82,672 IC4.18 ; IC5.11 1723.28,926.61 1723.28,812.28 v1(1723,812)
  Bottom Layer w7.5: v1(1225,805) 1228.5,808.5 1719.5,808.5 v1(1723,812)
SCK: IC3.23 IC5.3 | length 286
  Top Layer w7.5: IC3.23 945.43,1177.68 967.75,1200 967.75,1221.89 IC5.3
TOUT: IC5.16 pad.11@1635,770 R9.2 R10.1 | length 636.5
  Top Layer w7.5: R9.2 1660,708.5 R10.1 1660.94,710.56 1660.94,735.56 1634.22,762.27 1634.22,1208.11 1648,1221.89 IC5.16
TX: IC4.17 IC5.12 | length 758.9
  Top Layer w7.5: v1(1286,863) 1286,689.53 IC4.17 ; IC5.12 1689.33,990 v1(1749.36,990)
  Bottom Layer w7.5: v1(1286,863) 1623,863 1749.36,989.36 v1(1749.36,990)
USB5V_IN: C8.2 D4.1 IC1.4 IC6.3 J1.A4 J1.A9 LED1.2 pad.9@1305,410 R3.1 | length 3616
  Top Layer w7.5: C8.2 220,591 201,572 201,373 249,373 249,416 260,427 430,427 462,395 528,395 550.75,372.25 D4.1 551,341 ; IC1.4 459.82,827.6 467.88,819.54 467.88,808.93 605,671.81 605,345.39 600.61,341 551,341 ; IC6.3 1087.76,639.26 1070,621.5 1070,437.5 972,339.5 972,124 928,80 LED1.2 824,80 799,55 642,55 551,146 551,341 ; J1.A4 1165.94,325 1284.06,325 J1.A9 1284.06,390 pad.9@1304.53,410.47 ; pad.9@1305,410 1306.86,411.86 1321.86,411.86 1423.5,513.5 1488,513.5 ; v1(1464,599) 1464,537.5 1488,513.5 ; R3.1 1488,513.5
  Bottom Layer w7.5: v1(1070,610) 1075.5,604.5 1458.5,604.5 v1(1464,599)
USBD+: IC4.4 IC6.4 J1.A6 | length 853.4
  Top Layer w7.5: IC6.4 IC6.4@1182,667.6 ; J1.A6 1205.32,377.68 1182,401 IC6.4@1182,667.6 ; IC4.4 1359.84,572 1296,572 1260,608 1260,652.38 1250.01,662.37 1250.01,745.99 1233,763 1147,763 1147,667.6 IC6.4@1182,667.6
USBD-: IC4.5 IC6.5 J1.A7 | length 674.6
  Top Layer w7.5: IC6.5 1222.6,742.4 1237.51,727.49 1237.51,649.87 1244.69,642.69 1244.69,423.69 ; J1.A7 1244.69,423.69 ; IC4.5 1379.53,558.53 1244.69,423.69
VBAT: C7.1 IC1.3 J2.2 pad.9@295,825 Q1.3 R7.1 R12.2 | length 1664.5
  Top Layer w7.5: J2.2 348.19,825 IC1.3 346.5,823.31 R12.2 R7.1 v1(560,660) ; v1(1484,448) 1500,464 1640,464 Q1.3
  Bottom Layer w7.5: v1(560,660) 957.25,660 1169.25,448 v1(1484,448)
VRegOut: C1.1 C2.1 C3.1 C6.1 C10.1 IC2.5 IC3.8 IC3.13 IC5.1 pad.11@960,585 R1.2 | length 2190.9
  Top Layer w7.5: IC3.8 596,1177.68 ; IC3.13 642.76,1010 ; v1(670,955) 670,1004.1 C3.1 642.76,1010 ; v1(685,716.25) 685,713.7 712.01,686.69 R1.2 712.01,492 ; C1.1 C2.1 712.01,492 ; IC2.5 977.4,603.4 940,566 C10.1 940,492 712.01,492 ; IC5.1 871.85,1340 849.8,1317.95 C6.1 658.95,1317.95 596,1255 596,1177.68 ; 596,1177.68 576,1177.68 526,1127.68 526,949.5 542.25,933.25 591.56,933.25 642.76,984.44 642.76,1010
  Bottom Layer w7.5: v1(670,955) 670,905 735,840 735,766.25 v1(685,716.25)
pads on no net: D3.2 D4.2 IC2.4 IC3.1 IC3.2 IC3.3 IC3.4 IC3.5 IC3.6 IC3.7 IC3.11 IC3.14 IC3.15 IC3.16 IC3.17 IC3.21 IC3.25 IC4.1 IC4.2 IC4.6 IC4.7 IC4.9 IC4.10 IC4.11 IC4.13 IC4.14 IC4.15 IC4.16 IC4.19 IC4.20 IC5.10 IC5.15 IC6.1 J1.1 J1.2 J1.3 J1.4 J1.A2 J1.A3 J1.A5 J1.A8 J1.A10 J1.A11 J1.B1 J1.B2 J1.B3 J1.B4 J1.B5 J1.B6 J1.B7 J1.B8 J1.B9 J1.B10 J1.B11 J1.B12 J2.3 J2.4 S1.A1 S1.B2 SW1. SW1.3 SW1.4 SW1.5 SW1.6 SW1.7 Z1.2

## Polygon pours and split planes (outlines as drawn)
GND on Bottom Layer "GND_L02_P001" (solid, pour order 1): 50,1650 820,1650 820,1415 1810,1415 1810,45 50,45

## Keep-outs
Top Layer:
  lines w10: 45,38.58 1815,38.58 1815,1418.58 1025,1418.58 825,1418.58 825,1653.58 45,1653.58 45,203.58 45,38.58

## Silkscreen, mask and mechanical layers (free items; w line width, h text height)
Top Overlay:
  text "Vbat" at 267,787 h10
  text "Tout" at 1582,772 h10
  text "Vreg" at 902,595.33 h10
  text "USB5V" at 1272,427 h10